# EAGLE board Four Monks Expander 1 (mix lvl) PANEL (EAGLE 7.7.0)
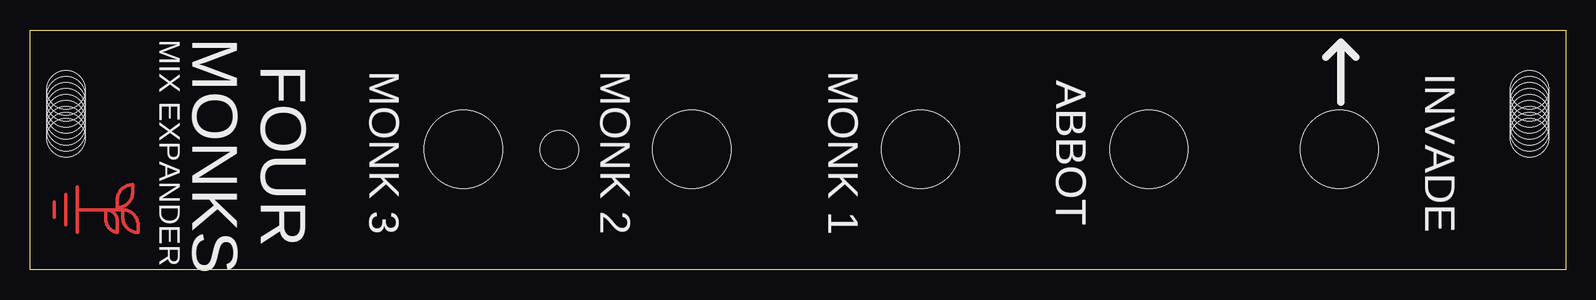
[diagram p0: board, top side]
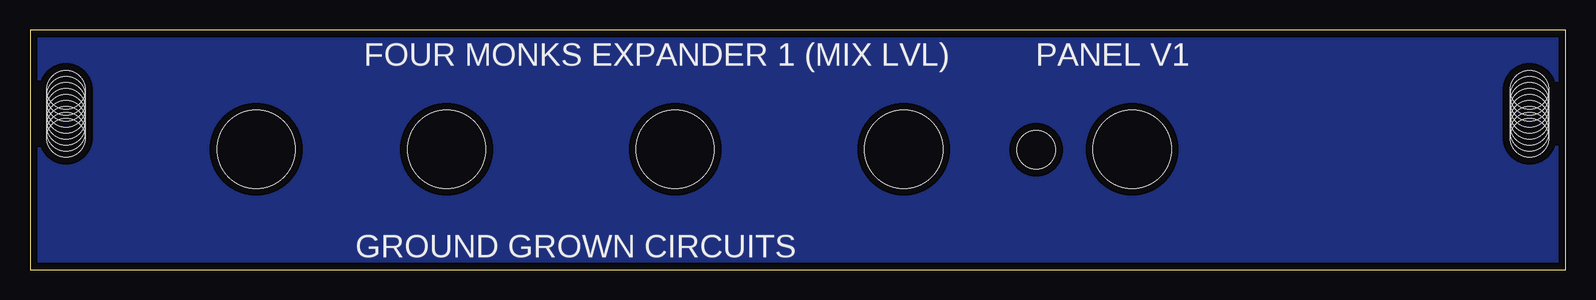
[diagram p1: board, bottom side, seen from below]

Size 128 x 20 mm. Coordinates in mm from the lower left corner, seen from the top.
Outline: 0,0 0,20 128,20 128,0 0,0
Copper layers (1*16): Top 0.035mm / dielectric 1.5mm / Bottom 0.035mm
Design rules "SparkFun": minimum track width 8mil, minimum drill 20mil, track to track 8mil, track to pad 8mil, pad to pad 8mil, via to via 8mil, smd to smd 8mil, copper to edge 8mil, drill to drill 8mil, minimum pad ring 12mil, minimum via ring 10mil, stop-mask expansion 4mil, vias tented up to drill 20mil, thermal gap 10mil
Holes 3.2 mm at 44.12,10

## Footprints (pad centres in the part's own frame; a part is rotated, then mirrored left to right if it is on the bottom)
MOUNT_DRILL = hole 3.2: 3,9; 3,8.5; 3,8; 3,7.5; 3,7; 3,6.5; 3,6; 3,5.5; 3,5
JACK_DRILL = hole 6.5: 0,0

## Placement (x,y rotation side)
E$1  [MOUNT_DRILL]  128,20 180 top
E$2  [MOUNT_DRILL]  0,20 180 bottom
E$3  [LOGO_SMALL_COPPER]  4,5 270 top
RV1  [JACK_DRILL]  93.27,10.04 180 top
RV2  [JACK_DRILL]  74.22,10.04 180 top
RV3  [JACK_DRILL]  55.17,10.04 180 top
RV4  [JACK_DRILL]  36.12,10.04 180 top
U$1  [JACK_DRILL]  109.14,10.04 180 top

## Library data of the parts
E$1-E$3 U$1 = GroundGrownCircuits
RV1-RV4 = GroundGrownCircuits; PROD_ID: RES-09177

## Tracks (layer width: path | path; a pad name or v marks a point on that pad's centre or on a via)
S$1
  pour Bottom (isolate 0.61): 0,0 0,20 128,20 128,0

## Text on the board
tPlace: MIX EXPANDER | FOUR / MONKS | MONK 3 | MONK 2 | MONK 1 | ABBOT | ABBOT | INVADE
bPlace: PANEL V1 | FOUR MONKS EXPANDER 1 (MIX LVL) | GROUND GROWN CIRCUITS